# Altium PCB ScreenBoard.PcbDoc (part 1 of 2)
Units mm, origin at the board's own origin, x right, y up, seen from the top; angles counter-clockwise.
Board outline 100 x 71.63 mm, 2 copper layers (Top Layer, Bottom Layer); 43 components, 41 nets, 216 pads, 1776 vias.
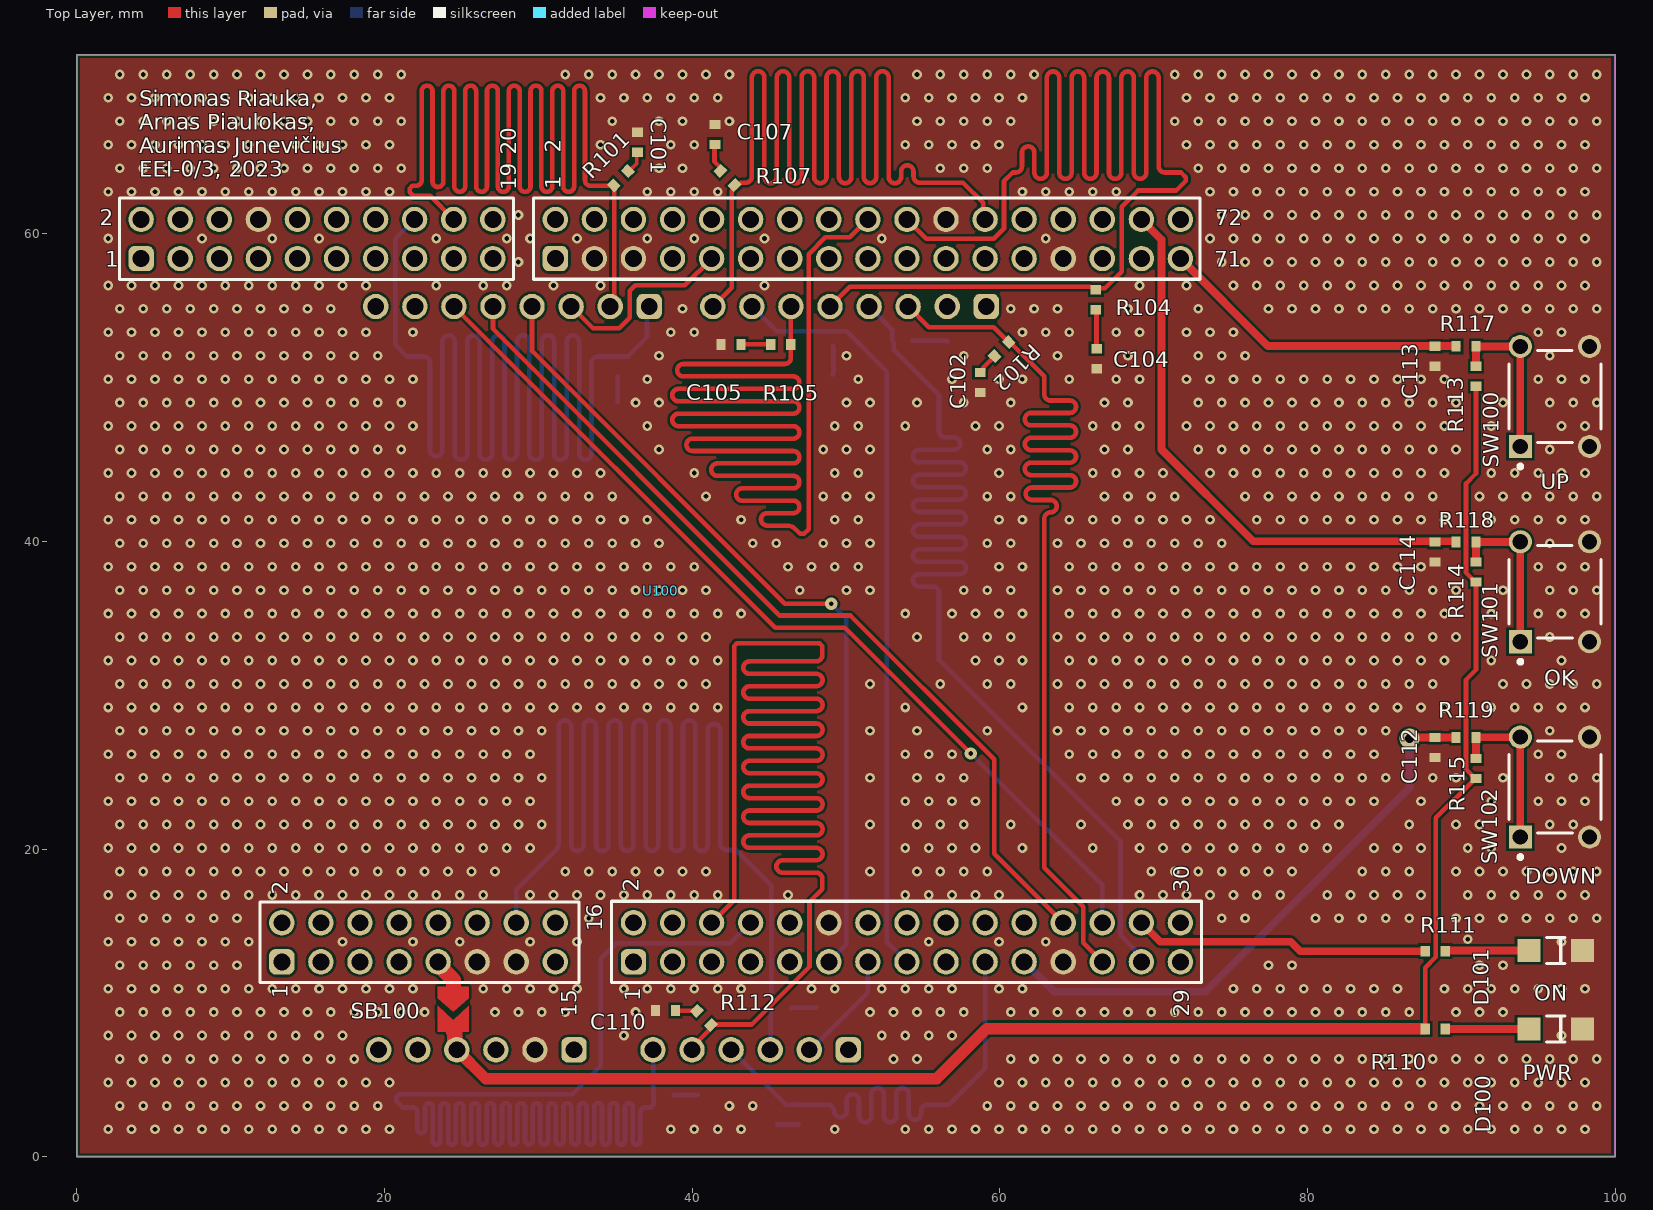
[diagram p0: Top Layer view]
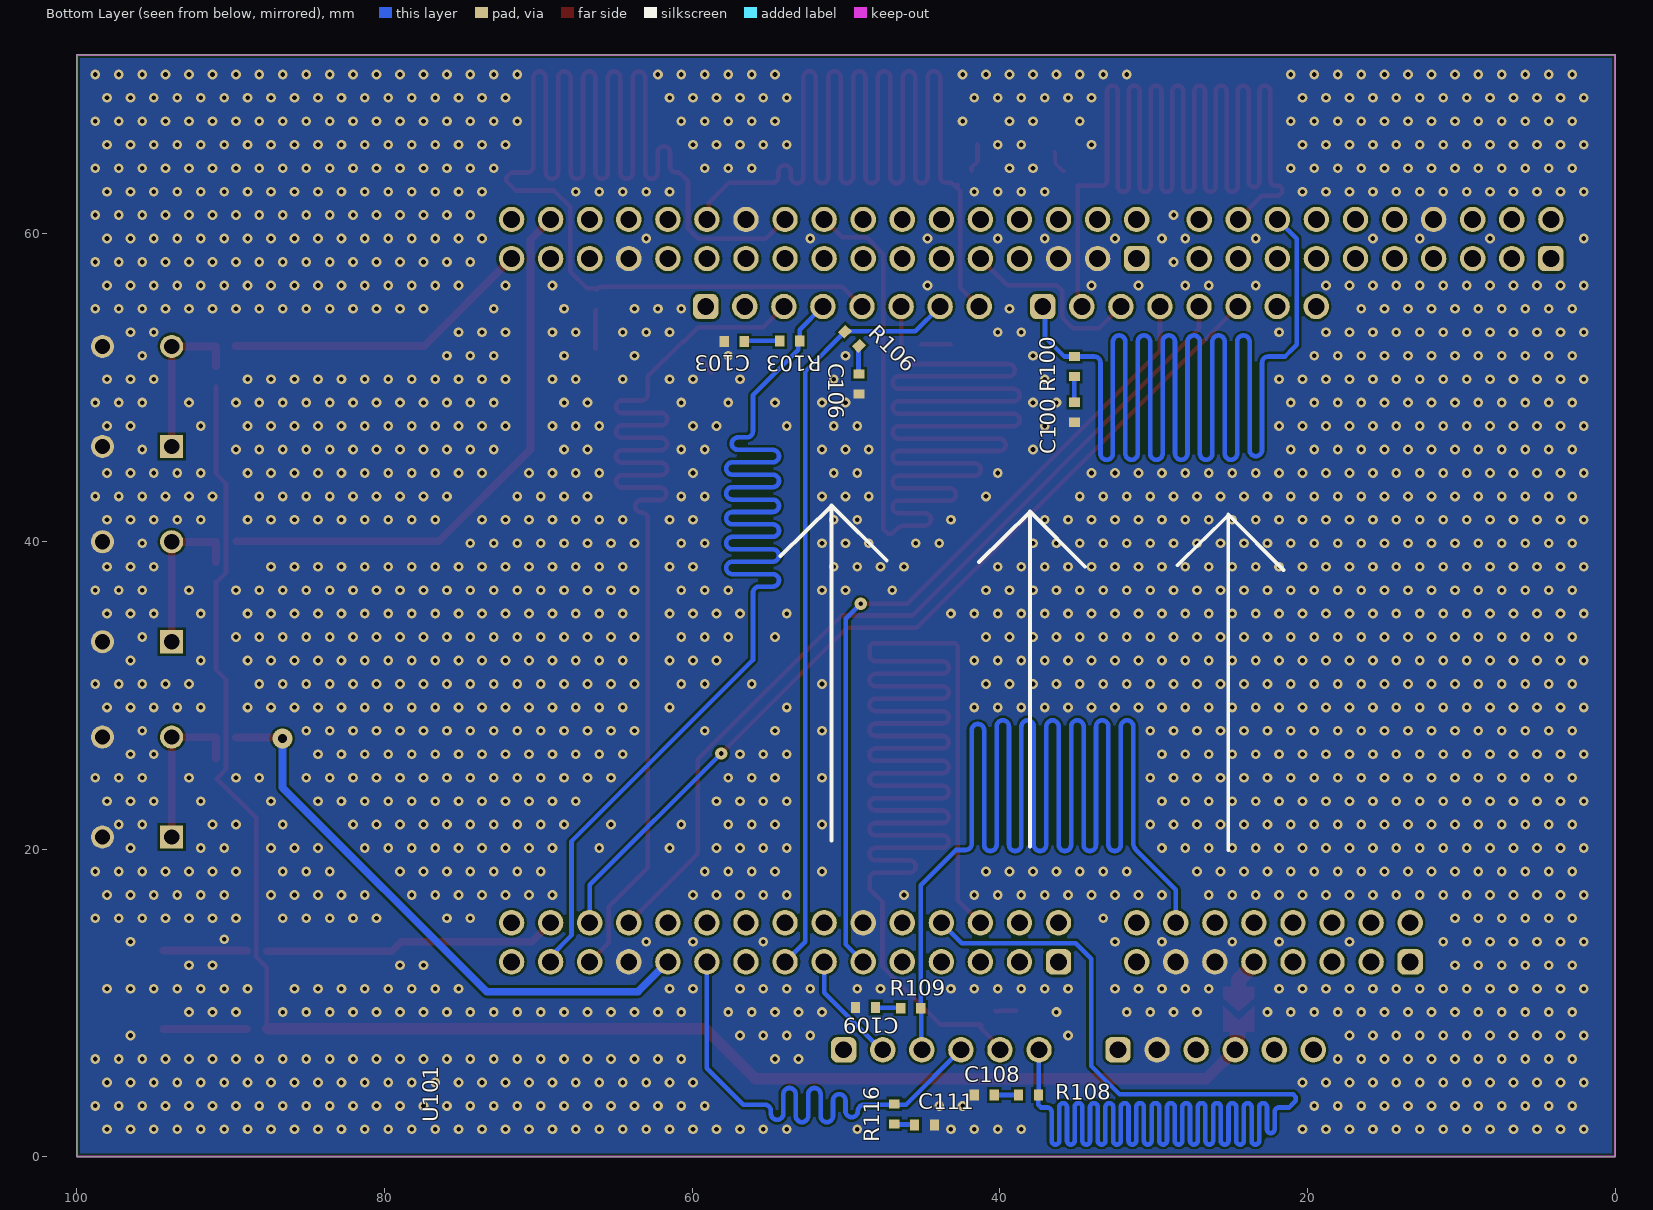
[diagram p1: Bottom Layer view, seen from below]

## Layer stack, top to bottom
Top Solder: solder mask 0.0102, Solder Resist, Dk 3.5
Top Layer: signal copper 0.0356
Dielectric 1: dielectric 0.32, FR-4, Dk 4.8
Bottom Layer: signal copper 0.0356
Bottom Solder: solder mask 0.0102, Solder Resist, Dk 3.5

## Board outline
0,0 100,0 100,71.628 0,71.628

## Design rules (kind name [scope] priority, off if disabled: settings)
Clearance [All] p1: gap=0.152 ignorepadtopadclearanceinfootprint=FALSE
HoleSize [All] p1: absolutevalues=TRUE maxlimit=2.54 minlimit=0.3 maxpercent=80.000 minpercent=20.000
MinimumAnnularRing [All] p1: minimumring=0.152
MinimumSolderMaskSliver [All] p1: minsoldermaskwidth=0.152
PolygonConnect [All] p1: connectstyle=Direct reliefconductorwidth=0.254 reliefentries=4 polygonreliefangle="90 Angle" airgapwidth=0.254
RoutingVias [All] p1: holewidth=0.3 width=0.604 viastyle="Through Hole" minholewidth=0.3 minwidth=0.604 maxholewidth=100 maxwidth=1.27
SilkToSolderMaskClearance [IsPad] p1: minsilkscreentomaskgap=0.15 clearancetoexposedcopper=TRUE
SolderMaskExpansion [All] p1: expansion=0.102 istentingtop=FALSE
Width [All] p1: maxlimit=5 minlimit=0.152 preferedwidth=0.254 minimp=50.000000 maximp=50.000000 favimp=50.000000
27 further rules are at their usual default settings.

## Components (designator, comment, footprint, x,y, rotation, side; value= is the part's Value field where it differs from the comment)
C100 "0.1uF" 0402_footprint 35.154,49.047 r270 bottom
C101 "0.1uF" 0402_footprint 36.449,65.303 r90 top
C102 "0.1uF" 0402_footprint 58.725,50.978 r270 top
C103 "0.1uF" 0402_footprint 56.616,52.99 r0 bottom
C104 "0.1uF" 0402_footprint 66.294,52.527 r270 top
C105 "0.1uF" 0402_footprint 43.18,52.807 r180 top
C106 "0.1uF" 0402_footprint 49.155,50.883 r270 bottom
C107 "0.1uF" 0402_footprint 41.478,65.807 r90 top
C108 "0.1uF" 0402_footprint 40.356,4.013 r0 bottom
C109 "0.1uF" 0402_footprint 48.078,9.703 r0 bottom
C110 "0.1uF" 0402_footprint 38.913,9.5 r180 top
C111 "0.1uF" 0402_footprint 45.542,2.057 r180 bottom
C112 "0.1uF" 0402_footprint 88.29,27.254 r270 top
C113 "33nF" 0402_footprint 88.29,52.68 r270 top
C114 "33nF" 0402_footprint 88.29,39.954 r270 top
D100 "HSMG-C150" FP-HSMG-C150-MFG 96.139,8.306 r180 top
D101 "HSMG-C150" FP-HSMG-C150-MFG 96.139,13.411 r180 top
R100 "4.7kOhm" 0402_footprint 35.154,50.719 r90 bottom
R101 "4.7kOhm" 0402_footprint 34.901,63.15 r45 top
R102 "4.7kOhm" 0402_footprint 59.66,52.04 r45 top
R103 "4.7kOhm" 0402_footprint 53.01,53.035 r0 bottom
R104 "4.7kOhm" 0402_footprint 66.243,55.063 r90 top
R105 "4.7kOhm" 0402_footprint 46.41,52.807 r180 top
R106 "4.7kOhm" 0402_footprint 49.152,52.708 r45 bottom
R107 "4.7kOhm" 0402_footprint 41.83,64.086 r315 top
R108 "4.7kOhm" 0402_footprint 37.49,4.013 r0 bottom
R109 "4.7kOhm" 0402_footprint 46.436,9.652 r180 bottom
R110 "150" 0402_footprint 88.95,8.306 r180 top
R111 "43" 0402_FOOTPRINT 88.951,13.36 r180 top
R112 "4.7kOhm" 0402_footprint 41.224,8.56 r135 top
R113 "10k" 0402_footprint 90.957,51.384 r270 top
R114 "10k" 0402_footprint 90.957,38.663 r270 top
R115 "0402" 0402_footprint 90.957,25.883 r270 top
R116 "4.7kOhm" 0402_footprint 46.863,2.129 r90 bottom
R117 "2k" 0402_footprint 90.962,52.68 r180 top
R118 "2k" 0402_footprint 90.962,39.954 r180 top
R119 "0402" 0402_footprint 90.957,27.254 r180 top
SB100 "Solder_bridge" SOLDER_BRIDGE 24.46,10.135 r270 top
SW100 "1825910-6" TECO-1825910-6_V 96.088,49.424 r90 top
SW101 "1825910-6" TECO-1825910-6_V 96.088,36.728 r90 top
SW102 "1825910-6" TECO-1825910-6_V 96.088,24.028 r90 top locked
U100 "NUCLEO-H755ZL_Zio" H7/H5_NUCLEO_ZIO -17.158,6.108 r90 top locked
U101 "3'5_LCD_ARDUINO" 3'5_LCD_ARDUINO 50.15,6.95 r90 bottom locked

## Footprints (in the part's own frame and the unit in brackets; to place one, negate y for a bottom-side part, rotate by r counter-clockwise, add the part's x,y. Pads: shape width x height; smd on the part's side, far side on the other; paste and mask are expansions set on the pad)
3'5_LCD_ARDUINO [mm]
  rrect50% 1.65x1.65 hole 1.1: 1(0,0) 7(0,-17.83) 13(48.32,8.97) 21(48.32,-12.94)
  round 1.65 hole 1.1: 2(0,-2.54) 3(0,-5.08) 4(0,-7.62) 5(0,-10.16) 6(0,-12.7) 8(0,-20.37) 9(0,-22.91) 10(0,-25.45) 11(0,-27.99) 12(0,-30.53) 14(48.32,6.43) 15(48.32,3.89) 16(48.32,1.35) 17(48.32,-1.19) 18(48.32,-3.73) 19(48.32,-6.27) 20(48.32,-8.81) 22(48.32,-15.48) 23(48.32,-18.02) 24(48.32,-20.56) 25(48.32,-23.1) 26(48.32,-25.64) 27(48.32,-28.18) 28(48.32,-30.72)
  silkscreen extent 13,-28.6 35.4,4.1
0402_footprint [mm]
  rect 0.6x0.7 smd: 1(0,0) 2(1.3,0)
0402_FOOTPRINT [mm]
  rect 0.6x0.7 smd: 1(0,0) 2(1.3,0)
FP-HSMG-C150-MFG [mm]
  rect 1.5x1.5 smd paste+0 mask+0: 1(-1.75,0) 2(1.75,0)
  silkscreen extent -0.6,-0.85 0.6,0.85, body extent -2.6,-0.95 2.6,0.95, height 0.25
H7/H5_NUCLEO_ZIO [mm]
  rrect50% 1.65x1.65 hole 1.1: 1(6.56,-30.48) 17(6.56,-53.34) 47(52.28,-21.336) 67(52.28,-48.26)
  round 1.65 hole 1.1: 2(9.1,-30.48) 3(6.56,-33.02) 4(9.1,-33.02) 5(6.56,-35.56) 6(9.1,-35.56) 7(6.56,-38.1) 8(9.1,-38.1) 9(6.56,-40.64) 10(9.1,-40.64) 11(6.56,-43.18) 12(9.1,-43.18) 13(6.56,-45.72) 14(9.1,-45.72) 15(6.56,-48.26) 16(9.1,-48.26) 18(9.1,-53.34) 19(6.56,-55.88) 20(9.1,-55.88) 21(6.56,-58.42) 22(9.1,-58.42) 23(6.56,-60.96) 24(9.1,-60.96) 25(6.56,-63.5) 26(9.1,-63.5) 27(6.56,-66.04) 28(9.1,-66.04) 29(6.56,-68.58) 30(9.1,-68.58) 31(6.56,-71.12) 32(9.1,-71.12) 33(6.56,-73.66) 34(9.1,-73.66) 35(6.56,-76.2) 36(9.1,-76.2) 37(6.56,-78.74) 38(9.1,-78.74) 39(6.56,-81.28) 40(9.1,-81.28) 41(6.56,-83.82) 42(9.1,-83.82) 43(6.56,-86.36) 44(9.1,-86.36) 45(6.56,-88.9) 46(9.1,-88.9) 48(54.82,-21.336) 49(52.28,-23.876) 50(54.82,-23.876) 51(52.28,-26.416) 52(54.82,-26.416) 53(52.28,-28.956) 54(54.82,-28.956) 55(52.28,-31.496) 56(54.82,-31.496) 57(52.28,-34.036) 58(54.82,-34.036) 59(52.28,-36.576) 60(54.82,-36.576) 61(52.28,-39.116) 62(54.82,-39.116) 63(52.28,-41.656) 64(54.82,-41.656) 65(52.28,-44.196) 66(54.82,-44.196) 68(54.82,-48.26) 69(52.28,-50.8) 70(54.82,-50.8) 71(52.28,-53.34) 72(54.82,-53.34) 73(52.28,-55.88) 74(54.82,-55.88) 75(52.28,-58.42) 76(54.82,-58.42) 77(52.28,-60.96) 78(54.82,-60.96) 79(52.28,-63.5) 80(54.82,-63.5) 81(52.28,-66.04) 82(54.82,-66.04) 83(52.28,-68.58) 84(54.82,-68.58) 85(52.28,-71.12) 86(54.82,-71.12) 87(52.28,-73.66) 88(54.82,-73.66) 89(52.28,-76.2) 90(54.82,-76.2) 91(52.28,-78.74) 92(54.82,-78.74) 93(52.28,-81.28) 94(54.82,-81.28) 95(52.28,-83.82) 96(54.82,-83.82) 97(52.28,-86.36) 98(54.82,-86.36) 99(52.28,-88.9) 100(54.82,-88.9)
  silkscreen extent 5.21,-90.26 56.22,-19.92
SOLDER_BRIDGE [mil]
  round 1 smd mask+1.97: 1(-36,1) 2(77,0)
  Top Layer pour cut-out: -7,42.98 -7,-43 11,-43 50.85,0.04 11,42.98
  Top Layer region: 79,39.37 79,-39.42 13,-40 50,0 13,39.37
  Top Layer region: -36,-39.37 -36,39.37 -6.97,39.37 28.46,0 -6.97,-39.37
TECO-1825910-6_V [mm] "Switch, 4-Leads, Body 5.99x5.99mm"
  rect 1.5x1.5 hole 0.99: 1(-3.25,2.25)
  round 1.5 hole 0.99: 2(3.25,2.25) 3(-3.25,-2.25) 4(3.25,-2.25)
  silkscreen extent -4.67,-2.99 2.99,3, body extent -3,-2.99 2.99,3, height 5

## Part data
C100 C101 C102 C103 C104 C105 C106 C107 C108 C109 C110 C111 C112 C113 C114: library part Capacitor_0402, "0402 capacitor"
D100 D101: library part CMP-2000-05061-2, "LED GREEN DIFFUSED 1206 SMD", Colour=Green, Forward Current=20mA, Forward Voltage=2.2V, Manufacturer=Broadcom, Max Junction Temp=+95°C, Power Dissipation=65mW, Reverse Voltage=5V, Temperature="-40°C to +85°C", Temperature Range High=+85°C, Temperature Range Low=-40°C, Automotive=No, Category=Diode, ComponentLink2Description=Buy, ComponentLink2URL=https://www.mouser.lt/ProductDetail/Wurth-Elektronik/156120RS75000?qs=2kOmHSv6VfTlw4DhG%252BTIQw%3D%3D, Device Class L1=Optoelectronics, Device Class L2=LEDs, Device Class L3=unset, Digikey Description="LED GREEN DIFFUSED 1206 SMD", Height=1.2mm, Ipc Land Pattern Name=DIOCP320160X55, Lead Free=Yes, Led Orientation="Top View", Luminous Intensity=15mcd, Manufacturer Part Number=HSMG-C150, Mouser Description="LED Uni-Color Green 570nm 2-Pin Chip LED T/R", Octopart=https://octopart.com/hsmg-c150-broadcom-71131304, Package=HSMG-C150, Peak Emmision Wavelength=570nm, RoHS=TRUE, Viewing Angle=170°, Wavelength=572nm
R100 R101 R102 R103 R104 R105 R106 R107 R108 R109 R110 R111 R112 R113 R114 R115 R116 R117 R118 R119: library part Resistor_0402, "0402 resistor"
SW100 SW101 SW102: library part CMP-1684-00021-1, "Tact Switch, SPST-NO, 0.05 A, -35 to 85 degC, 4-Pin THD, RoHS, Bulk", Actuator Color=Black, Contact Rating @ Voltage=0.05A@24VDC, Dielectric Strength=500VAC, Manufacturer="TE Connectivity", Maximum AC Voltage Rating=N/A, Maximum Contact Resistance=100mOhm, Maximum DC Voltage Rating=24V, Minimum Insulation Resistance=100MOhm, Operating Temperature=-35to85C, Package Description="4-Pin Through Hole Device, Body 5.99 x 5.99 mm, Pitch 6.5 mm", Package Reference=THD, Actuator Length=1.4mm, Actuator Material=PolybutyleneTerephthalate, Actuator Style=RoundButton, Base Material=N/A, Body Orientation=Straight, Bushing Type=Unthreaded, ComponentLink1Description=Buy, ComponentLink1URL=https://www.mouser.lt/ProductDetail/CUI-Devices/TS02-66-55-BK-260-LCR-D?qs=A6eO%252BMLsxmT6x4NEvNu8bQ%3D%3D, Contact Material=CopperAlloy, Contact Plating=Silver, Datasheet URL=http://www.te.com/commerce/DocumentDelivery/DDEController?Action=showdoc&DocId=Customer+Drawing%7F1825910%7FC9%7Fpdf%7FEnglish%7FENG_CD_1825910_C9.pdf%7F1825910-6, Datasheet Version="Rev. C9", Dimension=5.99x5mm, Electrical Life=100000Cycles, Family=1825910, Function=MomentaryContact, Housing Material=N/A, Illumination=N/R, Manufacturer URL=http://www.te.com, Mechanical Life=100000Cycles, Mounting=ThroughHole, Packaging=N/A, Part No=1825910-6, Pole Throw Configuration=SPST, Product Weight=N/A, RoHS=Yes, Seal Description=N/A, Seal Location=N/A, Switch Configuration=OFF(ON), Terminal Type=PCPins, Thread Size=N/R

## Via types
v1: diameter 0.635, hole 0.305, Top Layer to Bottom Layer, tented both sides, 1773 vias
v2: diameter 0.804, hole 0.3, Top Layer to Bottom Layer, tented both sides, 2 vias
v3: diameter 1.3, hole 0.6, Top Layer to Bottom Layer, tented both sides, 1 vias

## Nets (pads, with @x,y where several pads share a name; then routed paths per layer and width w, separated by ;. In a path a pad name is that pad's centre, name@x,y a point inside that pad or via, vN(x,y) a via of type N, cw(c..) or ccw(c..) an arc to the next point about the centre after c; other vN are vias at no path point)
5V: SB100.1 U100.9 | length 2
  Top Layer w1: U100.9@23.482,12.668 23.482,12.492 24.486,11.488 SB100.1@24.486,11.049
BTN_1: C113.1 R117.2 U100.99 | length 20.3
  Top Layer w0.508: U100.99@71.742,58.388 77.425,52.705 R117.2@89.687,52.705
BTN_2: C114.1 R118.2 U100.98 | length 37.1
  Top Layer w0.508: U100.98@69.202,60.928 70.51,59.619 70.51,45.974 76.479,40.005 R118.2@89.637,40.005
BTN_3: C112.1 R119.2 U100.37 | length 37.6
  Top Layer w0.508: v3(86.639,27.178) 86.716,27.254 R119.2@89.657,27.254
  Bottom Layer w0.508: U100.37@61.582,12.668 63.531,10.719 73.355,10.719 86.639,24.003 v3(86.639,27.178)
BTN_PWR: R110.2 R113.2 R114.2 R115.2 SB100.2 U101.10 | length 110.3
  Top Layer w0.3: R110.2@87.65,8.306 87.65,12.283 88.349,12.981 88.349,22.024 90.907,24.583 90.305,25.185 90.305,31.009 90.957,31.661 R114.2@90.957,37.363 90.907,37.363 90.305,37.965 90.305,43.76 90.957,44.412 R113.2@90.957,50.084
  Top Layer w0.75: U101.10@24.7,6.95 26.57,5.08 55.905,5.08 59.157,8.331 R110.2@87.579,8.331
  Top Layer w1: SB100.2@24.46,8.179 24.576,8.063 24.576,7.25 U101.10@24.508,7.182
  Top Layer w1.5: U101.10@24.7,6.95 U101.10@24.7,6.99
CS: R109.2 U100.14 U101.3 | length 145
  Bottom Layer w0.3: U100.14@28.562,15.208 28.562,17.36 30.972,19.77 31.122,19.92 ccw(c30.634,20.408) 31.324,20.408 31.324,27.963 cw(c31.728,27.963) 32.132,27.963 32.132,20.274 ccw(c32.536,20.274) 32.94,20.274 32.94,27.963 cw(c33.344,27.963) 33.748,27.963 33.748,20.274 ccw(c34.152,20.274) 34.556,20.274 34.556,27.963 cw(c34.96,27.963) 35.364,27.963 35.364,20.274 ccw(c35.768,20.274) 36.172,20.274 36.172,27.963 cw(c36.576,27.963) 36.98,27.963 36.98,20.274 ccw(c37.384,20.274) 37.788,20.274 37.788,27.963 cw(c38.192,27.963) 38.596,27.963 38.596,20.274 ccw(c39,20.274) 39.404,20.274 39.404,27.963 cw(c39.808,27.963) 40.212,27.963 40.212,20.274 ccw(c40.616,20.274) 41.02,20.274 41.02,27.729 cw(c41.424,27.729) 41.828,27.729 41.828,20.341 ccw(c42.232,20.341) 42.232,19.937 42.847,19.937 43.026,19.758 45.136,17.648 R109.2@45.136,9.652 45.103,9.619 45.103,6.983 U101.3@45.07,6.95
D0: R100.2 U100.62 U101.21 | length 133
  Bottom Layer w0.3: U100.62@21.958,60.928 20.701,59.671 20.701,52.781 20.919,52.563 21.463,52.019 22.55,52.019 cw(c22.55,51.615) 22.954,51.615 22.954,45.943 ccw(c23.358,45.943) 23.762,45.943 23.762,52.987 cw(c24.166,52.987) 24.57,52.987 24.57,45.709 ccw(c24.974,45.709) 25.378,45.709 25.378,52.987 cw(c25.782,52.987) 26.186,52.987 26.186,45.709 ccw(c26.59,45.709) 26.994,45.709 26.994,52.987 cw(c27.398,52.987) 27.802,52.987 27.802,45.709 ccw(c28.206,45.709) 28.61,45.709 28.61,52.987 cw(c29.014,52.987) 29.418,52.987 29.418,45.709 ccw(c29.822,45.709) 30.226,45.709 30.226,52.987 cw(c30.63,52.987) 31.034,52.987 31.034,45.709 ccw(c31.438,45.709) 31.842,45.709 31.842,52.987 cw(c32.246,52.987) 32.65,52.987 32.65,45.709 ccw(c33.054,45.709) 33.458,45.709 33.458,51.615 cw(c33.862,51.615) 33.862,52.019 34.012,52.019 R100.2@35.154,52.019 35.814,52.019 37.06,53.265 U101.21@37.06,55.27
D1: R101.1 U100.64 U101.22 | length 129.6
  Top Layer w0.3: U100.64@24.498,60.928 22.967,62.459 21.869,62.459 21.633,62.695 21.633,62.943 21.809,63.119 21.908,63.119 22.058,63.119 ccw(c22.058,63.473) 22.412,63.473 22.412,69.276 cw(c22.766,69.276) 23.12,69.276 23.12,63.393 ccw(c23.474,63.393) 23.828,63.393 23.828,69.276 cw(c24.182,69.276) 24.536,69.276 24.536,63.078 ccw(c24.89,63.078) 25.244,63.078 25.244,69.276 cw(c25.598,69.276) 25.952,69.276 25.952,63.078 ccw(c26.306,63.078) 26.66,63.078 26.66,69.276 cw(c27.014,69.276) 27.368,69.276 27.368,63.078 ccw(c27.722,63.078) 28.076,63.078 28.076,69.276 cw(c28.43,69.276) 28.784,69.276 28.784,63.078 ccw(c29.138,63.078) 29.492,63.078 29.492,69.276 cw(c29.846,69.276) 30.2,69.276 30.2,63.078 ccw(c30.554,63.078) 30.908,63.078 30.908,69.276 cw(c31.262,69.276) 31.616,69.276 31.616,63.078 ccw(c31.97,63.078) 32.324,63.078 32.324,69.276 cw(c32.678,69.276) 33.032,69.276 33.032,63.473 ccw(c33.386,63.473) 33.386,63.119 34.347,63.119 R101.1@34.901,63.119 ; U101.22@34.67,55.27 34.925,55.525 34.925,62.09 34.937,62.102 34.937,63.114 R101.1@34.901,63.15 R101.1@34.698,63.15
D2: R102.2 U100.41 U101.15 | length 75
  Top Layer w0.3: U101.15@54.04,55.27 55.386,53.924 59.614,53.924 R102.2@60.579,52.959 ; R102.2@60.617,52.997 62.89,50.724 62.89,49.711 62.89,49.561 ccw(c63.294,49.561) 63.294,49.157 64.552,49.157 cw(c64.552,48.753) 64.552,48.349 62.031,48.349 ccw(c62.031,47.945) 62.031,47.541 64.552,47.541 cw(c64.552,47.137) 64.552,46.733 62.031,46.733 ccw(c62.031,46.329) 62.031,45.925 64.552,45.925 cw(c64.552,45.521) 64.552,45.117 62.031,45.117 ccw(c62.031,44.713) 62.031,44.309 64.552,44.309 cw(c64.552,43.905) 64.552,43.501 62.083,43.501 ccw(c62.083,43.097) 62.083,42.693 63.294,42.693 cw(c63.294,42.289) 63.294,41.885 ccw(c63.294,41.481) 62.89,41.481 62.89,37.285 62.89,18.796 65.43,16.256 65.43,13.899 U100.41@66.662,12.668
D3: R103.1 U100.43 U101.16 | length 85.9
  Bottom Layer w0.3: U101.16@51.5,55.27 53.01,53.76 53.01,53.598 R103.1@53.01,53.035 53.112,52.933 53.112,52.451 56.049,49.514 56.049,48.587 56.049,47.163 ccw(c56.453,47.163) 56.453,46.759 57.021,46.759 cw(c57.021,46.355) 57.021,45.951 54.761,45.951 ccw(c54.761,45.547) 54.761,45.143 57.386,45.143 cw(c57.386,44.739) 57.386,44.335 54.761,44.335 ccw(c54.761,43.931) 54.761,43.527 57.386,43.527 cw(c57.386,43.123) 57.386,42.719 54.761,42.719 ccw(c54.761,42.315) 54.761,41.911 57.386,41.911 cw(c57.386,41.507) 57.386,41.103 54.761,41.103 ccw(c54.761,40.699) 54.761,40.295 57.386,40.295 cw(c57.386,39.891) 57.386,39.487 54.761,39.487 ccw(c54.761,39.083) 54.761,38.679 57.386,38.679 cw(c57.386,38.275) 57.386,37.871 54.761,37.871 ccw(c54.761,37.467) 54.761,37.063 55.645,37.063 cw(c55.645,36.659) 56.049,36.659 56.049,36.509 56.049,32.292 67.843,20.498 67.843,14.392 69.202,13.033 U100.43@69.202,12.668
D4: R104.2 U100.86 U101.17 | length 121.2
  Top Layer w0.3: U101.17@48.691,55.016 50.241,56.566 65.867,56.566 65.921,56.513 66.093,56.513 R104.2@66.243,56.363 66.332,56.452 66.84,56.452 67.92,57.531 67.92,61.747 68.986,62.814 71.476,62.814 72.088,63.427 72.088,63.675 71.78,63.983 71.689,63.983 70.731,63.983 cw(c70.731,64.387) 70.327,64.387 70.327,70.143 ccw(c69.923,70.143) 69.519,70.143 69.519,63.972 cw(c69.115,63.972) 68.711,63.972 68.711,70.143 ccw(c68.307,70.143) 67.903,70.143 67.903,63.972 cw(c67.499,63.972) 67.095,63.972 67.095,70.143 ccw(c66.691,70.143) 66.287,70.143 66.287,63.972 cw(c65.883,63.972) 65.479,63.972 65.479,70.143 ccw(c65.075,70.143) 64.671,70.143 64.671,63.972 cw(c64.267,63.972) 63.863,63.972 63.863,70.143 ccw(c63.459,70.143) 63.055,70.143 63.055,63.972 cw(c62.651,63.972) 62.247,63.972 62.247,65.277 ccw(c61.843,65.277) 61.439,65.277 61.439,64.387 cw(c61.035,64.387) 61.035,63.983 60.833,63.983 60.268,63.418 60.268,60.319 59.614,59.665 55.224,59.665 U100.86@53.962,60.928
D5: R105.1 U100.84 U101.18 | length 121
  Top Layer w0.3: U101.18@46.42,55.27 46.42,52.928 46.42,51.937 cw(c46.016,51.937) 46.016,51.533 39.422,51.533 ccw(c39.422,51.129) 39.422,50.725 46.57,50.725 cw(c46.57,50.321) 46.57,49.917 39.11,49.917 ccw(c39.11,49.513) 39.11,49.109 46.57,49.109 cw(c46.57,48.705) 46.57,48.301 39.11,48.301 ccw(c39.11,47.897) 39.11,47.493 46.57,47.493 cw(c46.57,47.089) 46.57,46.685 40.026,46.685 ccw(c40.026,46.281) 40.026,45.877 46.57,45.877 cw(c46.57,45.473) 46.57,45.069 41.642,45.069 ccw(c41.642,44.665) 41.642,44.261 46.57,44.261 cw(c46.57,43.857) 46.57,43.453 43.258,43.453 ccw(c43.258,43.049) 43.258,42.645 46.57,42.645 cw(c46.57,42.241) 46.57,41.837 44.874,41.837 ccw(c44.874,41.433) 44.874,41.029 46.189,41.029 cw(c46.189,40.339) 46.676,40.827 46.826,40.677 47.018,40.485 47.267,40.485 47.574,40.792 47.574,58.674 48.662,59.762 50.256,59.762 U100.84@51.422,60.928
D6: R106.2 U100.31 U101.19 | length 49.4
  Bottom Layer w0.3: U101.19@43.88,55.27 45.487,53.663 50.036,53.663 R106.2@50.071,53.627 52.654,51.044 52.654,13.976 U100.31@53.962,12.668
D7: R107.2 U100.90 U101.20 | length 111.1
  Top Layer w0.3: U101.20@41.34,55.27 42.57,56.5 42.57,62.776 42.749,62.955 R107.2@42.749,63.167 ; R107.2@42.874,63.042 43.155,63.322 43.331,63.322 43.481,63.322 ccw(c43.481,63.726) 43.885,63.726 43.885,70.162 cw(c44.289,70.162) 44.693,70.162 44.693,63.69 ccw(c45.097,63.69) 45.501,63.69 45.501,70.162 cw(c45.905,70.162) 46.309,70.162 46.309,63.69 ccw(c46.713,63.69) 47.117,63.69 47.117,70.162 cw(c47.521,70.162) 47.925,70.162 47.925,63.69 ccw(c48.329,63.69) 48.733,63.69 48.733,70.162 cw(c49.137,70.162) 49.541,70.162 49.541,63.69 ccw(c49.945,63.69) 50.349,63.69 50.349,70.162 cw(c50.753,70.162) 51.157,70.162 51.157,63.69 ccw(c51.561,63.69) 51.965,63.69 51.965,70.162 cw(c52.369,70.162) 52.773,70.162 52.773,63.69 ccw(c53.177,63.69) 53.581,63.69 53.581,64.044 cw(c53.985,64.044) 54.389,64.044 54.389,63.726 ccw(c54.793,63.726) 54.793,63.322 55.59,63.322 57.607,63.322 58.92,62.009 58.92,61.05 U100.90@59.042,60.928